# Altium PCB PCB2.PcbDoc
Units mil, origin at the board's own origin, x right, y up, seen from the top; angles counter-clockwise.
Board outline 6000 x 4000 mil, 2 copper layers (Top Layer, Bottom Layer); 30 components, 35 nets, 143 pads, 0 vias.
Unrouted connection lines stored in the file: 65.
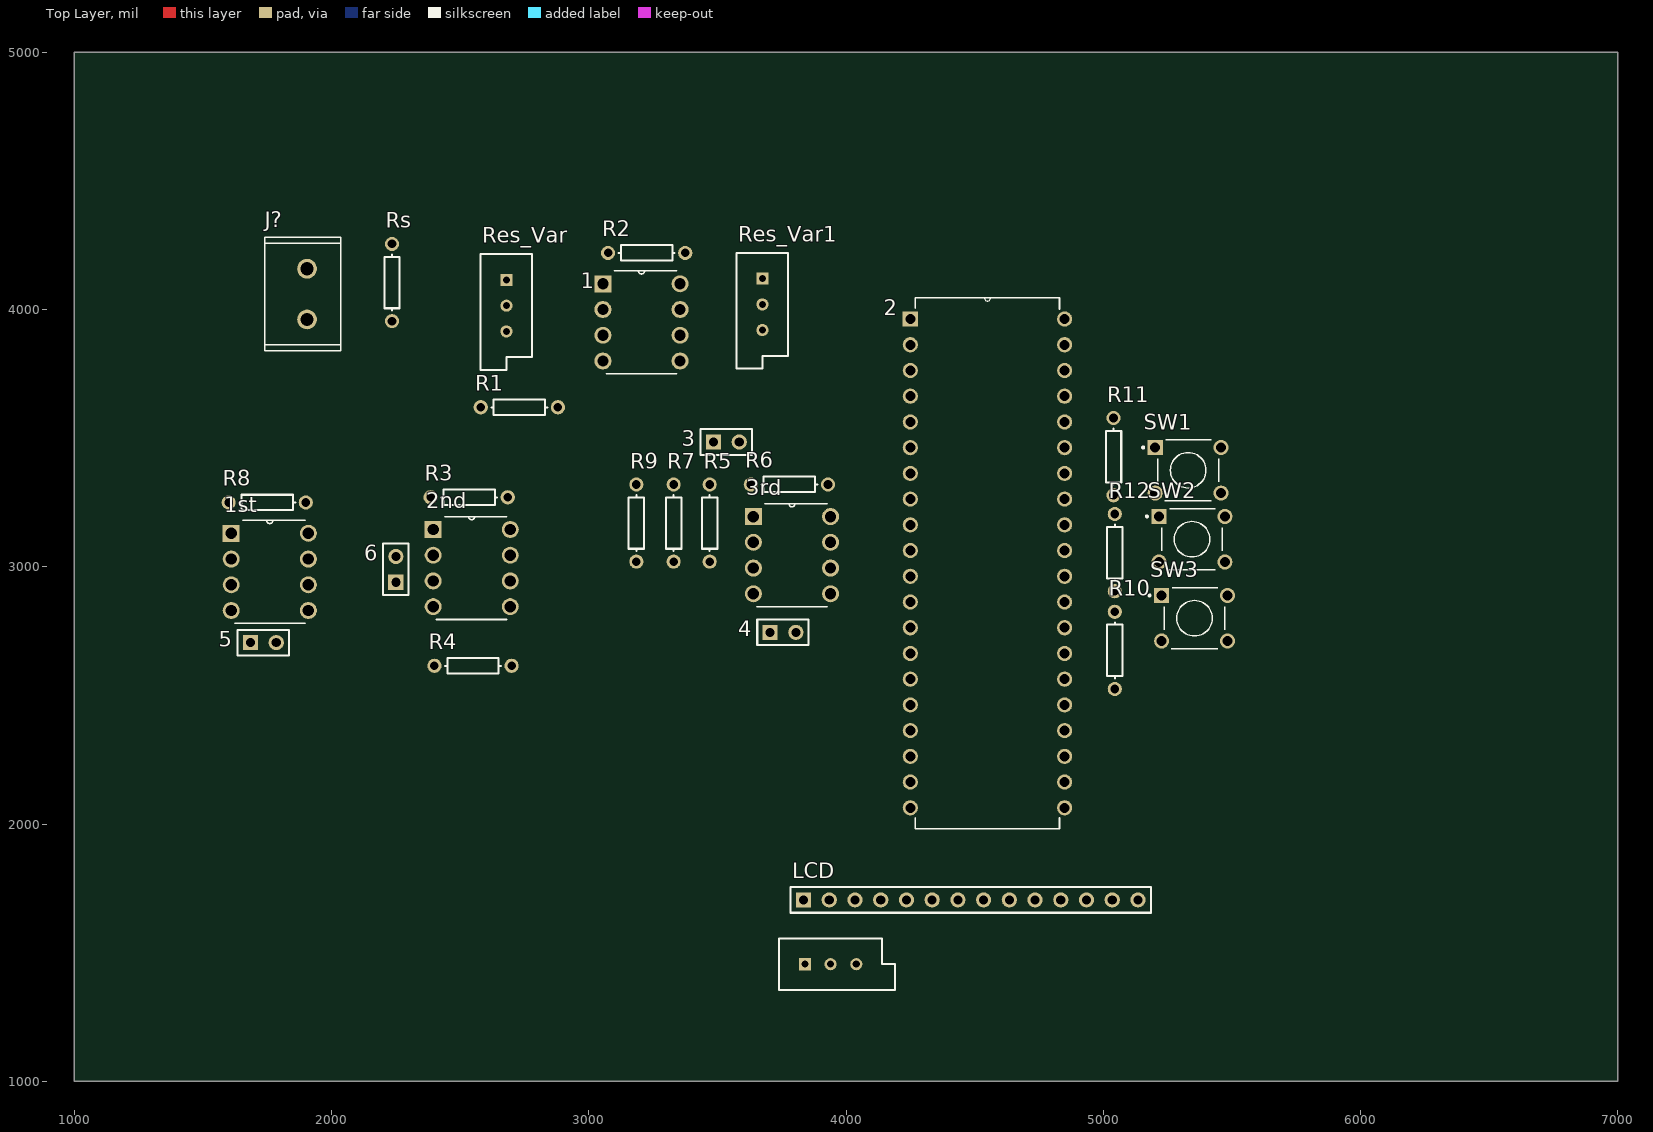
[diagram p0: Top Layer view]
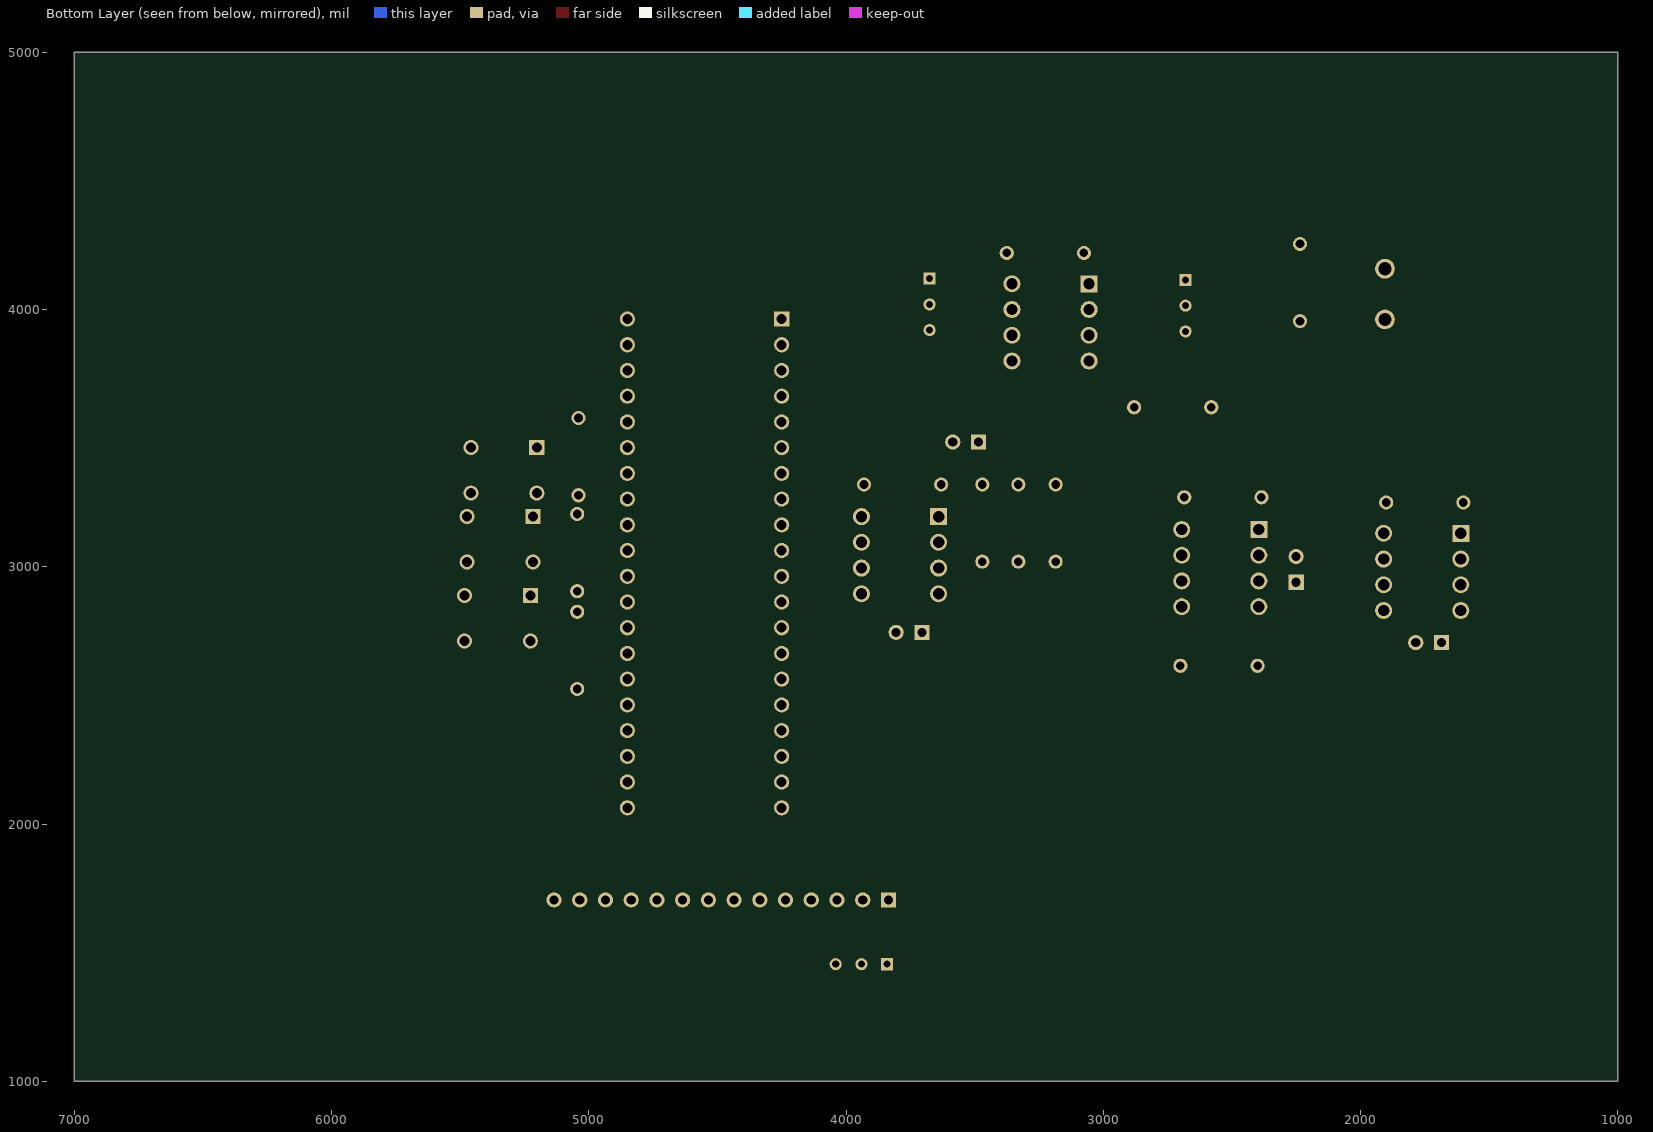
[diagram p1: Bottom Layer view, seen from below]

## Layer stack, top to bottom
Top Solder: solder mask 0.4, Solder Resist, Dk 3.5
Top Layer: signal copper 1.4
Dielectric 1: dielectric 12.6, FR-4, Dk 4.8
Bottom Layer: signal copper 1.4
Bottom Solder: solder mask 0.4, Solder Resist, Dk 3.5

## Board outline
1000,1000 7000,1000 7000,5000 1000,5000

## Design rules (kind name [scope] priority, off if disabled: settings)
Clearance [All] p1: gap=10 ignorepadtopadclearanceinfootprint=FALSE except(0: Arc-Hole Track-Hole SMDPad-Hole THPad-Hole Via-Hole Fill-Hole Poly-Hole Region-Hole Text-Hole)
PolygonConnect [All] p1: connectstyle=Relief reliefconductorwidth=10 reliefentries=4 polygonreliefangle="90 Angle" airgapwidth=10
RoutingVias [All] p1: holewidth=28 width=50 viastyle="Through Hole" minholewidth=28 minwidth=50 maxholewidth=28 maxwidth=50
SolderMaskExpansion [All] p1: expansion=4
Width [All] p1: maxlimit=10 minlimit=10 preferedwidth=10
30 further rules are at their usual default settings.

## Components (designator, comment, footprint, x,y, rotation, side; value= is the part's Value field where it differs from the comment)
1 "OP07CN" *DIP254P762X533-8 3355,3800 r0 top
1st "OP07CN" *DIP254P762X533-8 1910,2830 r0 top
2 "PIC18F452-I/P" *DIP254P1524X483-40 4850,2063.01 r0 top
2nd "OP07CN" *DIP254P762X533-8 2695,2845 r0 top
3 "Header 1" HDR1X2 3485,3485 r0 top
3rd "OP07CN" *DIP254P762X533-8 3940,2895 r0 top
4 "Header 3" HDR1X2 3705,2745 r0 top
5 "Header 2" HDR1X2 1685,2705 r0 top
6 "Header 4" HDR1X2 2250,2940 r90 top
J? "691102710002" *691102710002 1905,4060 r90 top
LCD "Header 14" HDR1X14 3835,1705 r0 top
R1 "" AXIAL-0.3 2730,3620 r180 top value=10K
R2 "" AXIAL-0.3 3225,4220 r0 top value=10K
R3 "" AXIAL-0.3 2535,3270 r0 top value=1K
R4 "" AXIAL-0.3 2550,2615 r0 top value=1K
R5 "" AXIAL-0.3 3470,3170 r90 top value=150K
R6 "" AXIAL-0.3 3780,3320 r0 top value=330K
R7 "" AXIAL-0.3 3330,3170 r270 top value=3K4
R8 "" AXIAL-0.3 1750,3250 r0 top value=100
R9 "" AXIAL-0.3 3185,3170 r270 top value=430
R10 "" AXIAL-0.3 5045,2675 r270 top value=10K
R11 "" AXIAL-0.3 5040,3428.13 r270 top value=10K
R12 "" AXIAL-0.3 5045,3055 r270 top value=10K
Res_Var "" VR5 2680,4015 r270 top value=1K
Res_Var1 "" VR5 3675,4020 r270 top value=1K
Rs "" AXIAL-0.3 2235,4105 r90 top value=10K
SW1 "1825910-6" *SW_1825910-6-4 5330,3375 r0 top
SW2 "1825910-6" *SW_1825910-6-4 5345,3107.12 r0 top
SW3 "1825910-6" *SW_1825910-6-4 5355,2800 r0 top
? "RPot" VR5 3940,1455 r0 top value=10K

## Footprints (in the part's own frame and the unit in brackets; to place one, negate y for a bottom-side part, rotate by r counter-clockwise, add the part's x,y. Pads: shape width x height; smd on the part's side, far side on the other; paste and mask are expansions set on the pad)
*691102710002 [mm]
  round 1.95 hole 1.3: 1(-2.5,0) 2(2.5,0)
  silkscreen extent -5.6,-3.3 5.6,4.2
*DIP254P762X533-8 [mil]
  rect 66x66 hole 44: 1(-300,300)
  round 66 hole 44: 2(-300,200) 3(-300,100) 4(-300,0) 5(0,0) 6(0,100) 7(0,200) 8(0,300)
  silkscreen extent -287,-50 -13,350
*DIP254P1524X483-40 [mil]
  rect 59x59 hole 39: 1(-600,1900)
  round 59 hole 39: 2(-600,1800) 3(-600,1700) 4(-600,1600) 5(-600,1500) 6(-600,1400) 7(-600,1300) 8(-600,1200) 9(-600,1100) 10(-600,1000) 11(-600,900) 12(-600,800) 13(-600,700) 14(-600,600) 15(-600,500) 16(-600,400) 17(-600,300) 18(-600,200) 19(-600,100) 20(-600,0) 21(0,0) 22(0,100) 23(0,200) 24(0,300) 25(0,400) 26(0,500) 27(0,600) 28(0,700) 29(0,800) 30(0,900) 31(0,1000) 32(0,1100) 33(0,1200) 34(0,1300) 35(0,1400) 36(0,1500) 37(0,1600) 38(0,1700) 39(0,1800) 40(0,1900)
  silkscreen extent -580,-82 -20,1982
*SW_1825910-6-4 [mm]
  rect 1.498x1.498 hole 0.99: 1(-3.25,2.25)
  round 1.498 hole 0.99: 2(3.25,2.25) 3(-3.25,-2.25) 4(3.25,-2.25)
  silkscreen extent -4.54,-3 3,3
AXIAL-0.3 [mm] "Axial Device, Thru-Hole; 2 Leads; 0.3 in Pin Spacing"
  round 1.4 hole 0.85: 1(-3.81,0) 2(3.81,0)
  silkscreen extent -2.77,-0.76 2.77,0.76
HDR1X2 [mm] "Connector; Header; 2 Position"
  rect 1.5x1.5 hole 0.9: 1(0,0)
  round 1.5 hole 0.9: 2(2.54,0)
  silkscreen extent -1.27,-1.27 3.81,1.27
HDR1X14 [mm] "Connector; Header; 14 Position"
  rect 1.5x1.5 hole 0.9: 1(0,0)
  round 1.5 hole 0.9: 2(2.54,0) 3(5.08,0) 4(7.62,0) 5(10.16,0) 6(12.7,0) 7(15.24,0) 8(17.78,0) 9(20.32,0) 10(22.86,0) 11(25.4,0) 12(27.94,0) 13(30.48,0) 14(33.02,0)
  silkscreen extent -1.27,-1.27 34.29,1.27
VR5 [mm] "Thru-Hole; 3 Leads"
  rect 1.2x1.2 hole 0.7: 1(-2.54,0)
  round 1.2 hole 0.7: 2(0,0) 3(2.54,0)
  silkscreen extent -5.08,-2.54 6.35,2.54

## Part data
1 1st 2nd 3rd: "OP07 Series 22V 5MHz Very Low Offset Single Bipolar Operational Amplifier -DIP-8", Package="DIP-8 STMicroelectronics", Availability=Unavailable, MF=STMicroelectronics, MP=OP07CN, Price=None, SnapEDA_Link=https://www.snapeda.com/parts/OP07CN/STMicroelectronics/view-part/?ref=snap
2: "PIC18 Series 1.5 kB RAM 32 kB Flash 8-Bit Enhanced Microcontroller - PDIP-40", Package="DIP-40 Microchip", Availability=Unavailable, MF=Microchip, MP=PIC18F452-I/P, Price=None, SnapEDA_Link=https://www.snapeda.com/parts/PIC18F452-I/P/Microchip/view-part/?ref=snap
3 4 6: library part "Header 2", "Header, 2-Pin", LatestRevisionDate=17-Jul-2002, LatestRevisionNote="Re-released for DXP Platform.", Publisher="Altium Limited"
5: "Header, 2-Pin", LatestRevisionDate=17-Jul-2002, LatestRevisionNote="Re-released for DXP Platform.", Publisher="Altium Limited"
J?: "102 Series 5mm Pitch Straight, PCB Terminal Block, Through Hole, 2 Way", Package=None, Availability=Unavailable, MF="Wurth Electronics", MP=691102710002, Price=None, SnapEDA_Link=https://www.snapeda.com/parts/691102710002/Wurth%20Electronics%20Inc./view-part/?ref=snap
LCD: "Header, 14-Pin", LatestRevisionDate=17-Jul-2002, LatestRevisionNote="Re-released for DXP Platform.", Publisher="Altium Limited"
R1 R2 R3 R4 R5 R6 R7 R8 R9 R10 R11 R12 Rs: library part Res1, "Resistor", LatestRevisionDate=17-Jul-2002, LatestRevisionNote="Re-released for DXP Platform.", PackageDescription="Axial Device, Thru-Hole; 2 Leads; 0.3 in Pin Spacing", PackageReference=AXIAL-0.3, Published=8-Jun-2000, Publisher="Altium Limited"
Res_Var Res_Var1: library part RPot, "Potentiometer", LatestRevisionDate=17-Jul-2002, LatestRevisionNote="Re-released for DXP Platform.", PackageDescription="Variable Resistor, Thru-Hole; 3 Leads", PackageReference=VR5, Published=8-Jun-2000, Publisher="Altium Limited", Set Position=0.5, Sim Note="Enter the Resistance value and the set point into parameter fields."
SW1 SW2 SW3: "FSM4JH=6MM TACT SWITCH, HIGH TEMP", Contact_Current_Rating="50 mA", Package=None, Availability=Unavailable, Configuration_Pole-Throw="Single Pole - Single Throw", EU_RoHS_Compliance=Compliant, MF="TE Connectivity", MP=1825910-6, Price=None, SnapEDA_Link=https://www.snapeda.com/parts/1825910-6/TE%20Connectivity%20ALCOSWITCH%20Switches/view-part/?ref=snap, TE_purchase_URL=https://www.te.com/usa-en/product-1825910-6.html?te_bu=Cor&te_type=disp&te_campaign=seda_glo_cor-seda-global-disp-prtnr-fy19-seda-model-bom-cta_sma-317_1&elqCampaignId=32493
?: "Potentiometer", LatestRevisionDate=17-Jul-2002, LatestRevisionNote="Re-released for DXP Platform.", PackageDescription="Variable Resistor, Thru-Hole; 3 Leads", PackageReference=VR5, Published=8-Jun-2000, Publisher="Altium Limited", Set Position=0.5, Sim Note="Enter the Resistance value and the set point into parameter fields."

## Nets (pads, with @x,y where several pads share a name; then routed paths per layer and width w, separated by ;. In a path a pad name is that pad's centre, name@x,y a point inside that pad or via, vN(x,y) a via of type N, cw(c..) or ccw(c..) an arc to the next point about the centre after c; other vN are vias at no path point)
GND: 1st.3 1st.6 2nd.2 2nd.3 2nd.7 6.2 ?.1 LCD.1 R3.1 R3.2 R4.1 R8.2 R9.1 Res_Var.2 SW1.4 SW2.4 SW3.4
Net1_2: 1.2 R2.2
Net1_3: 1.3 Rs.2
Net1_4: 1.4 3.1
Net1_6: 1.6 2.2 Res_Var.3
Net1_7: 1.7 3.2
Net1st_2: 1st.2 R8.1
Net1st_4: 1st.4 5.1
Net1st_7: 1st.7 5.2
Net2_3: 2.3 3rd.6 R6.2
Net2_15: 2.15 LCD.4
Net2_16: 2.16 LCD.5
Net2_17: 2.17 LCD.6
Net2_19: 2.19 LCD.7
Net2_20: 2.20 LCD.8
Net2_21: 2.21 LCD.9
Net2_22: 2.22 LCD.10
Net2_27: 2.27 LCD.11
Net2_28: 2.28 LCD.12
Net2_29: 2.29 LCD.13
Net2_30: 2.30 LCD.14
Net2_33: 2.33 R10.1 SW3.1
Net2_34: 2.34 R12.1 SW2.1
Net2_35: 2.35 R11.1 SW1.1
Net2nd_4: 2nd.4 6.1
Net2nd_6: 2nd.6 3rd.3 R4.2
Net3rd_2: 3rd.2 R5.2 R6.1
Net3rd_4: 3rd.4 4.1
Net3rd_7: 3rd.7 4.2
Net_3: ?.3 LCD.3
NetR1_2: R1.2 R2.1 Res_Var1.1 Res_Var.1
NetR5_1: R5.1 R7.2 R9.2
NetR10_2: R10.2 R11.2 R12.2
NetRes_Var1_2: Res_Var1.2 Res_Var1.3
VCC: ?.2 J?.1 LCD.2 R1.1 R7.1 Rs.1
pads on no net: 1.1 1.5 1.8 1st.1 1st.5 1st.8 2.1 2.4 2.5 2.6 2.7 2.8 2.9 2.10 2.11 2.12 2.13 2.14 2.18 2.23 2.24 2.25 2.26 2.31 2.32 2.36 2.37 2.38 2.39 2.40 2nd.1 2nd.5 2nd.8 3rd.1 3rd.5 3rd.8 J?.2 SW1.2 SW1.3 SW2.2 SW2.3 SW3.2 SW3.3

## Text inside footprints (layer, text, board x,y; h text height)
J?: Mechanical 4 "1" at 2009.33,3916.3 h73.82 r90; Mechanical 4 "1" at 2009.33,3916.3 h73.82 r90